# Altium PCB SensCharger.PcbDoc
Units mm, origin at the board's own origin, x right, y up, seen from the top; angles counter-clockwise.
Board outline 25.4 x 25.4 mm, 4 copper layers (Top Layer, Layer 1, Layer 2, Bottom Layer), stack 0.532 mm thick; 48 components, 34 nets, 150 pads, 73 vias.
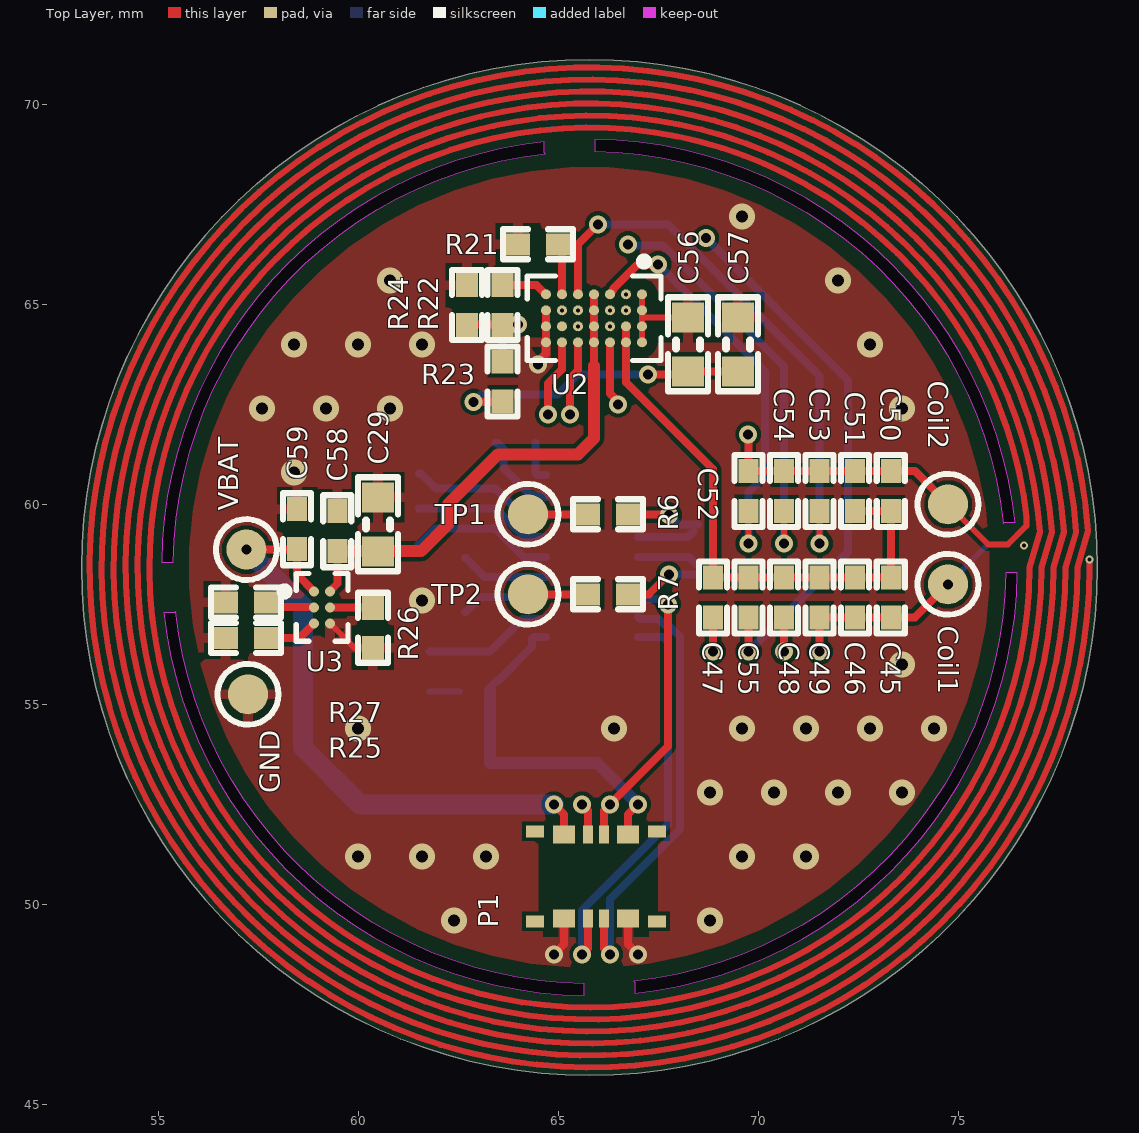
[diagram p0: Top Layer view]
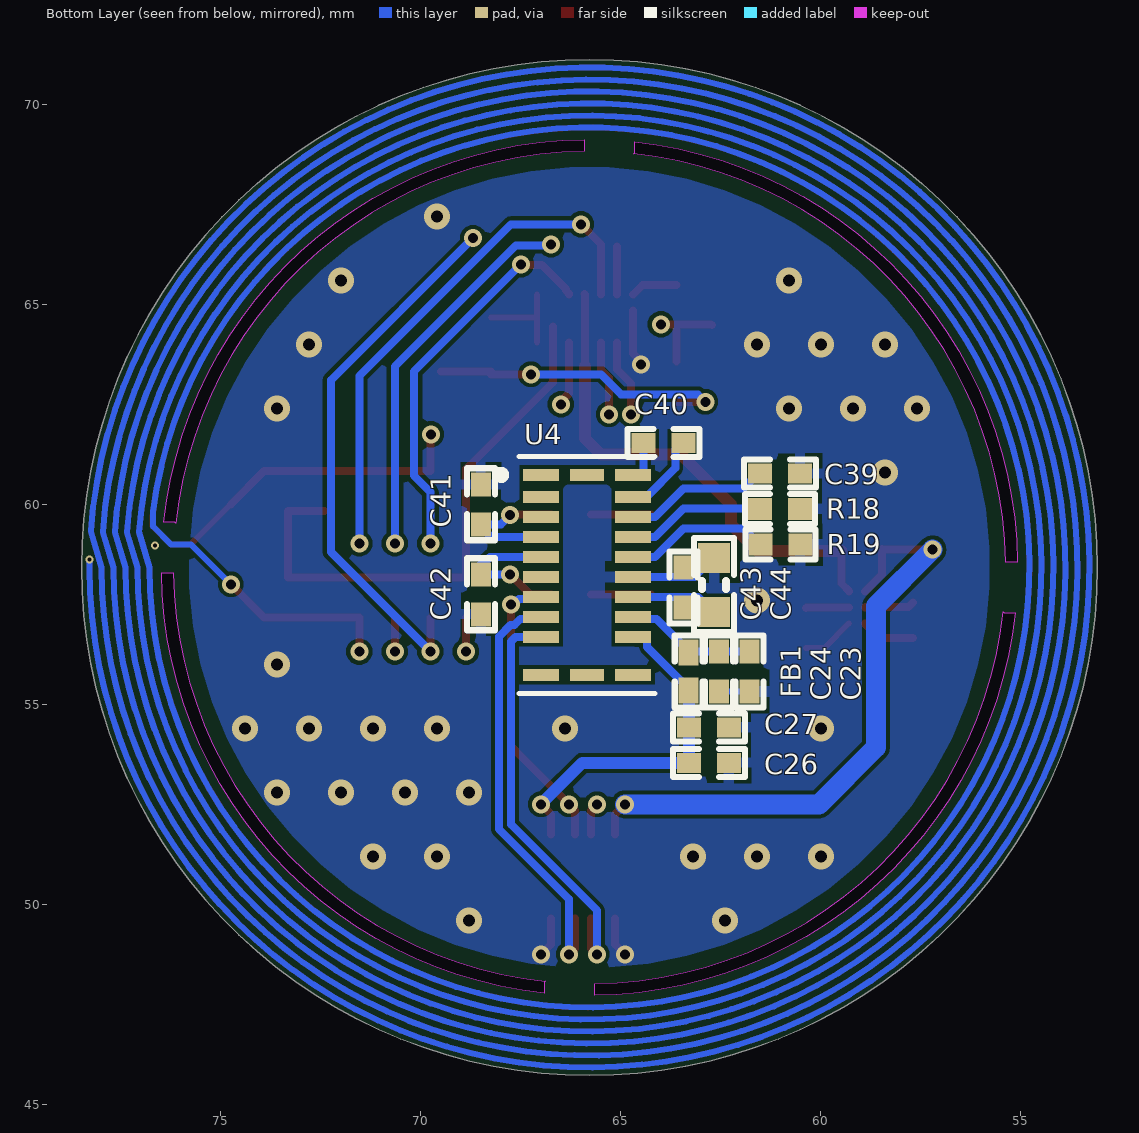
[diagram p1: Bottom Layer view, seen from below]
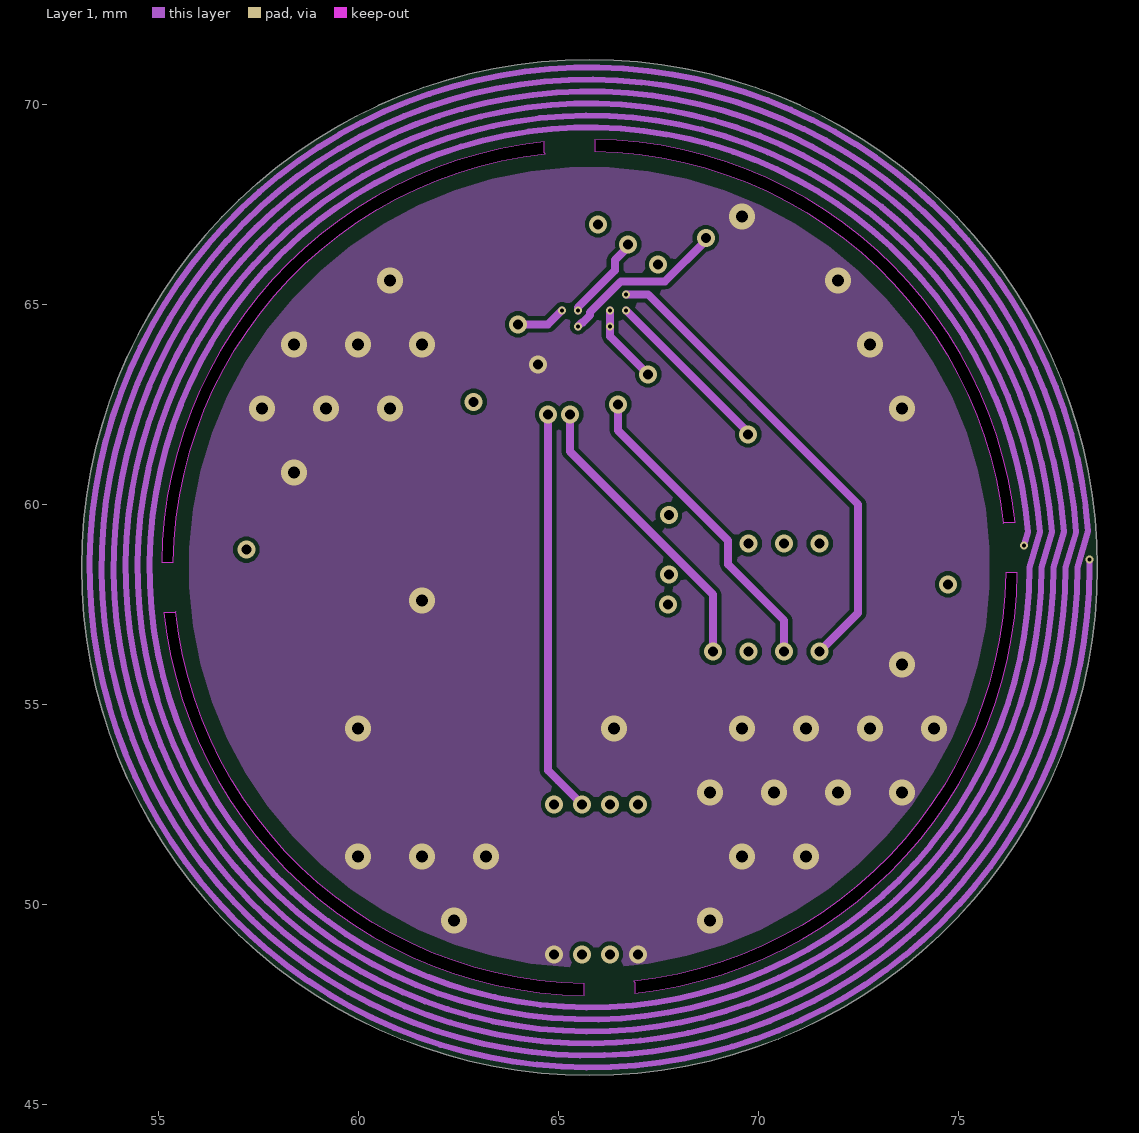
[diagram p2: Layer 1]
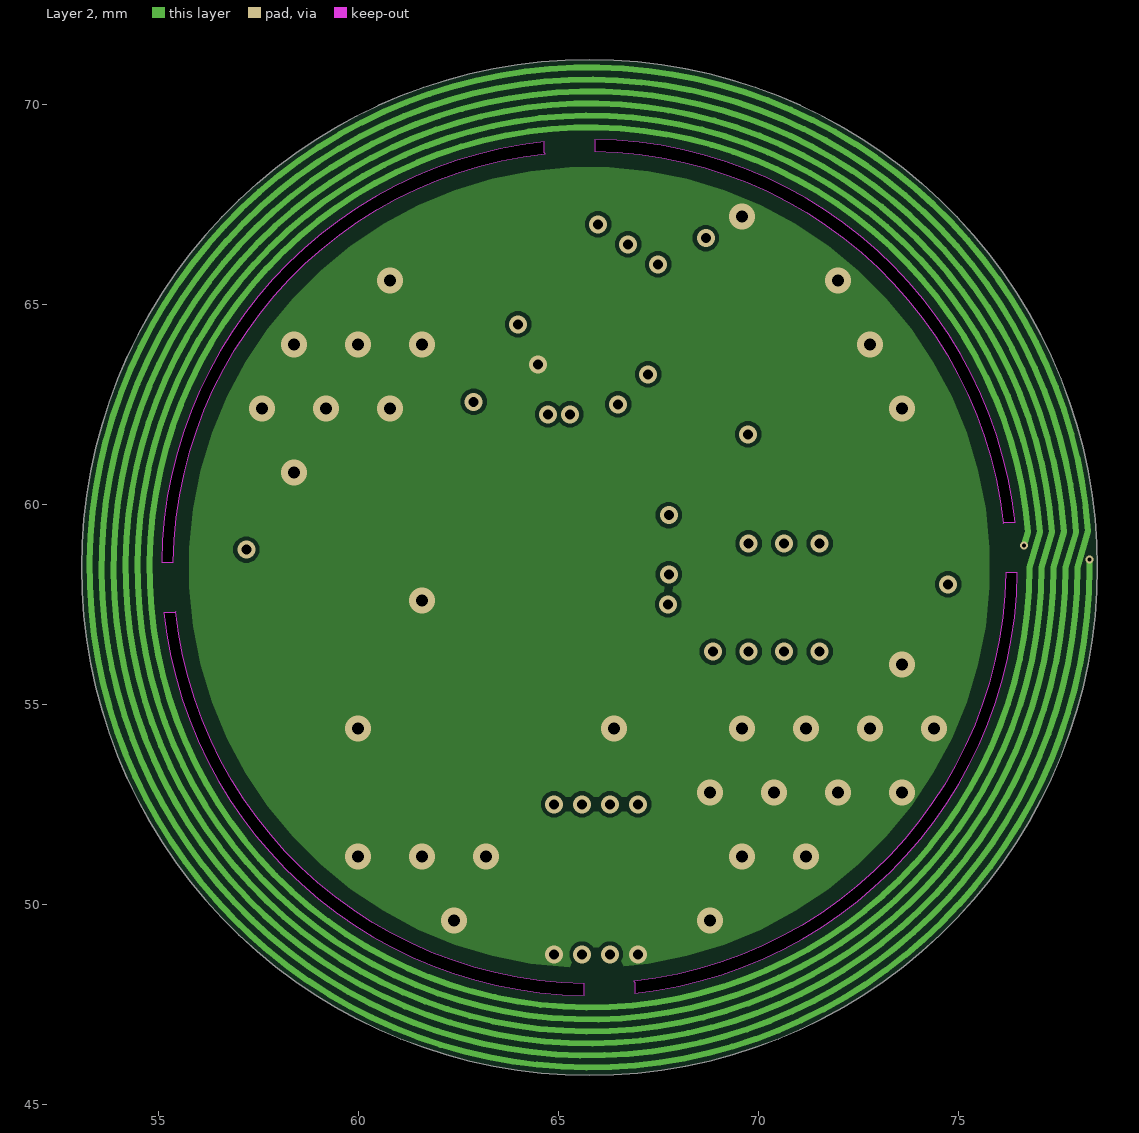
[diagram p3: Layer 2]
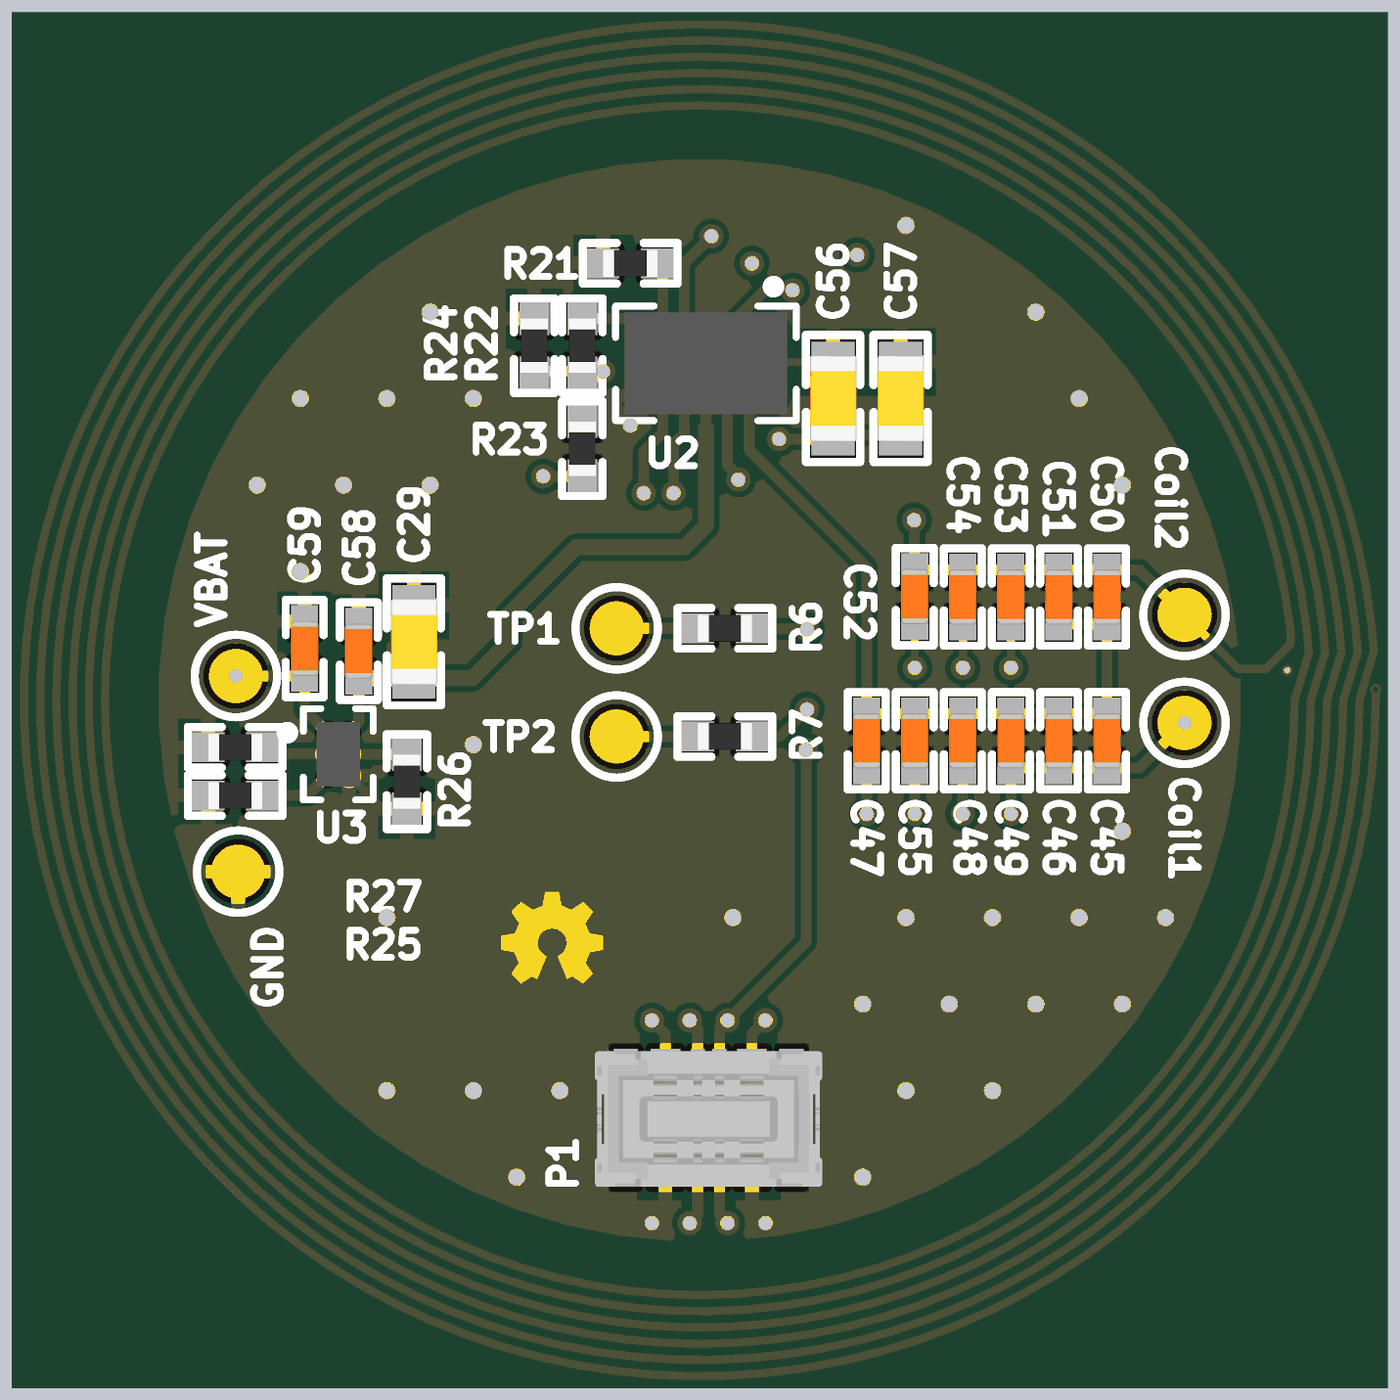
[diagram p4: 3D render of the assembled board from above, using the file's embedded part models]
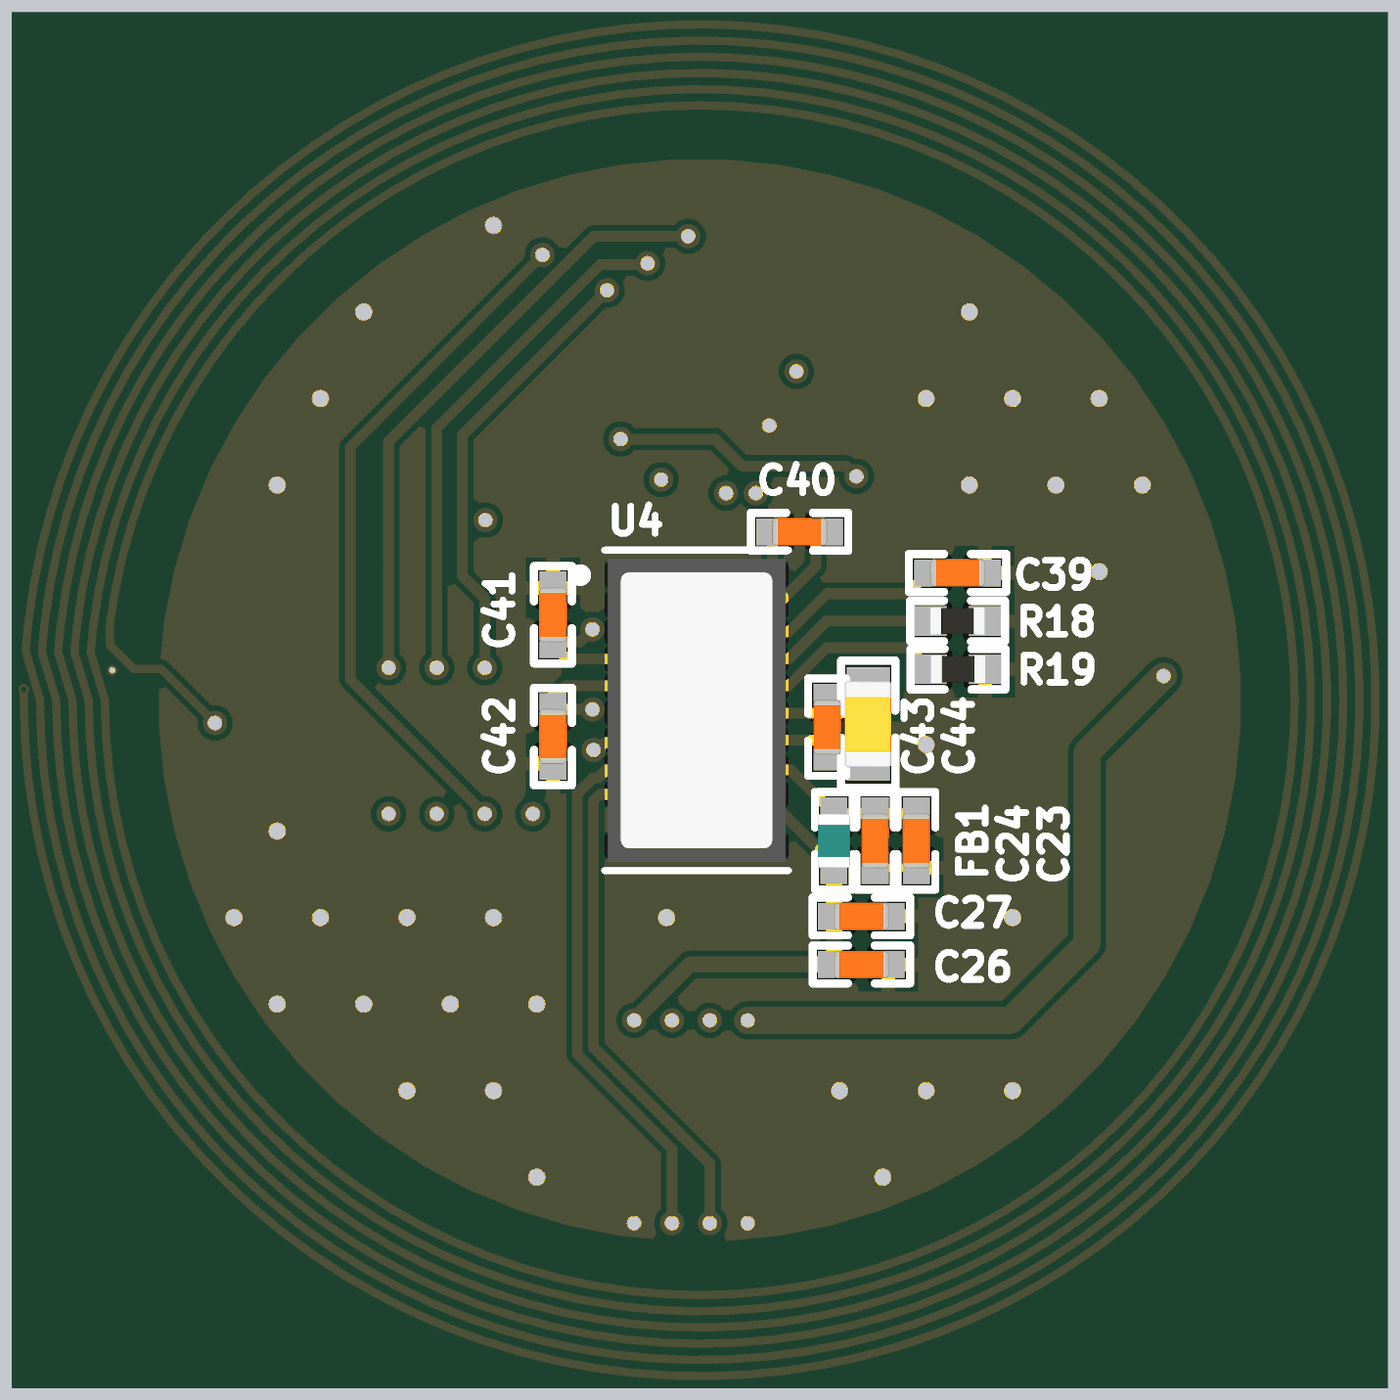
[diagram p5: 3D render of the assembled board from below, using the file's embedded part models]

## Layer stack, top to bottom
Top Solder: solder mask 0.0102, Solder Resist, Dk 3.5
Top Layer: signal copper 0.0175
Dielectric 2: prepreg 0.0711, PP-006, Dk 4.1
Layer 1: signal copper 0.0175
Dielectric 1: dielectric 0.32, FR-4, Dk 4.8
Layer 2: signal copper 0.0175
Dielectric 3: prepreg 0.0711, PP-006, Dk 4.1
Bottom Layer: signal copper 0.0175
Bottom Solder: solder mask 0.0102, Solder Resist, Dk 3.5

## Board outline
53.088,58.42 cw(c65.786,58.42) 65.786,71.118 cw(c65.786,58.42) 78.484,58.42 cw(c65.786,58.42) 65.786,45.722 cw(c65.786,58.42)
cut-out: 65.918,69.119 65.918,68.823 cw(c65.786,58.424) 76.127,59.523 76.159,59.555 76.426,59.555 ccw(c65.786,58.42)
cut-out: 76.485,58.288 76.189,58.288 cw(c65.79,58.42) 66.889,48.079 66.921,48.047 66.921,47.78 ccw(c65.786,58.42)
cut-out: 65.654,47.721 65.654,48.017 cw(c65.786,58.416) 55.445,57.317 55.413,57.285 55.146,57.285 ccw(c65.786,58.42)
cut-out: 55.087,58.552 55.383,58.552 cw(c65.782,58.42) 64.683,68.761 64.651,68.793 64.651,69.06 ccw(c65.786,58.42)

## Design rules (kind name [scope] priority, off if disabled: settings)
Clearance [All] p1: gap=0.1 ignorepadtopadclearanceinfootprint=TRUE
ComponentClearance [All] p1 off: gap=0.254 collisioncheckmode=3 verticalgap=0.254 showdistances=FALSE
DiffPairsRouting [InDifferentialPair('DiffPair')] p1: maxlimit=0.254 minlimit=0.089 mostfreqgap=0.2 toplayer_minwidth=0.089 toplayer_maxwidth=0.381 toplayer_prefwidth=0.15 midlayer1_minwidth=0.089 midlayer1_maxwidth=0.381 midlayer1_prefwidth=0.15 midlayer2_minwidth=0.089 midlayer2_maxwidth=0.381 midlayer2_prefwidth=0.15 bottomlayer_minwidth=0.089 bottomlayer_maxwidth=0.381 bottomlayer_prefwidth=0.15 maxuncoupledlength=12.7
HoleSize [All] p1 off: absolutevalues=TRUE maxlimit=2.54 minlimit=0.025 maxpercent=80.000 minpercent=20.000
HoleToHoleClearance [All] p1 off: gap=0.254 allowstackedmicrovias=TRUE
MatchedLengths usb [InDifferentialPair('USB')] p1: tolerance=1 checknetsindiffpair=FALSE checkdiffpairvsdiffpair=TRUE checkxsignals=TRUE checkothers=TRUE
MinimumAnnularRing [IsVia] p1: minimumring=0.05
MinimumSolderMaskSliver [All] p1 off: minsoldermaskwidth=0.254
PlaneConnect [InNet('NetC11_2')] p1: planeconnectstyle=Direct reliefexpansion=0.508 reliefentries=4 reliefconductorwidth=0.254 reliefairgap=0.254
PolygonConnect [All] p1: thpad.connectstyle=Relief thpad.reliefconductorwidth=0.254 thpad.reliefentries=4 thpad.polygonreliefangle="90 Angle" thpad.airgapwidth=0.254 smdpad.connectstyle=Relief smdpad.reliefconductorwidth=0.254 smdpad.reliefentries=4 smdpad.polygonreliefangle="90 Angle" smdpad.airgapwidth=0.254 via.connectstyle=Direct via.reliefconductorwidth=0.254 via.reliefentries=4 via.polygonreliefangle="90 Angle" via.airgapwidth=0.254
PolygonConnect 3V3MCU [InNet('NetC11_2')] p2: connectstyle=Direct reliefconductorwidth=0.254 reliefentries=4 polygonreliefangle="90 Angle" airgapwidth=0.254
PolygonConnect VBUSMCU [InNet('NetC12_2')] p3: connectstyle=Direct reliefconductorwidth=0.254 reliefentries=4 polygonreliefangle="90 Angle" airgapwidth=0.254
PolygonConnect VUSB [InNet('VUSB')] p4: connectstyle=Direct reliefconductorwidth=0 reliefentries=4 polygonreliefangle="90 Angle" airgapwidth=0
PolygonConnect viagnd [InNet('GND')] p5: thpad.connectstyle=Relief thpad.reliefconductorwidth=0.254 thpad.reliefentries=4 thpad.polygonreliefangle="90 Angle" thpad.airgapwidth=0.254 smdpad.connectstyle=Relief smdpad.reliefconductorwidth=0.254 smdpad.reliefentries=4 smdpad.polygonreliefangle="90 Angle" smdpad.airgapwidth=0.254 via.connectstyle=Direct via.reliefconductorwidth=0.254 via.reliefentries=4 via.polygonreliefangle="90 Angle" via.airgapwidth=0.254
RoutingVias [All] p1: holewidth=0.2 width=0.4 viastyle="Through Hole" minholewidth=0.1 minwidth=0.2 maxholewidth=6.3 maxwidth=1.27
SilkToSilkClearance [All] p1 off: silktosilkclearance=0.254
SilkToSolderMaskClearance [IsPad] p1 off: minsilkscreentomaskgap=0.254 clearancetoexposedcopper=TRUE
SolderMaskExpansion [All] p1: expansion=0.102 istentingtop=FALSE
Width [All] p1: maxlimit=1 minlimit=0.081 preferedwidth=0.15
22 further rules are at their usual default settings.

## Components (designator, comment, footprint, x,y, rotation, side; value= is the part's Value field where it differs from the comment)
C23 "100nF" C0402 61.781,55.82 r90 bottom value=100pF
C24 "4.7uF" C0402 62.543,55.82 r90 bottom value=100pF
C26 "100nF" C0402 62.797,53.534 r0 bottom value=100pF
C27 "4.7uF" C0402 62.797,54.423 r0 bottom value=100pF
C29 "2.2uF" C0603 60.5,59.5 r90 top value=100pF
C39 "1uF" C0402 61.019,60.773 r180 bottom value=100pF
C40 "1uF" C0402 63.94,61.535 r0 bottom value=100pF
C41 "10pF" C0402 68.5,60 r270 bottom value=100pF
C42 "10pF" C0402 68.5,57.75 r90 bottom value=100pF
C43 "100nF" C0402 63.432,57.923 r270 bottom value=100pF
C44 "10uF" C0603 62.67,57.979 r270 bottom value=100pF
C45 "47nF" C0402 73.318,57.67 r270 top value=100pF
C46 "68nF" C0402 72.429,57.67 r270 top value=100pF
C47 "22nF" C0402 68.873,57.67 r90 top value=100pF
C48 "10nF" C0402 70.651,57.67 r90 top value=100pF
C49 "68nF" C0402 71.54,57.67 r270 top value=100pF
C50 "1.8nF" C0402 73.318,60.329 r90 top value=100pF
C51 "100pF" C0402 72.429,60.329 r90 top
C52 "10nF" C0402 69.762,60.337 r90 top value=100pF
C53 "22nF" C0402 71.54,60.329 r90 top value=100pF
C54 "470nF" C0402 70.651,60.329 r90 top value=100pF
C55 "470nF" C0402 69.762,57.67 r90 top value=100pF
C56 "10uF" C0603 68.25,64 r90 top value=100pF
C57 "4.7uF" C0603 69.5,64 r90 top value=100pF
C58 "100nF" C0402 59.481,59.326 r90 top value=100pF
C59 "1uF" C0402 58.479,59.376 r90 top value=100pF
Coil1 "DNP" TP_SMD_1.0mm 74.75,58 r90 top
Coil2 "DNP" TP_SMD_1.0mm 74.75,60 r0 top
FB1 "BLM15AX102SN1D" IND0402 63.305,55.82 r270 bottom value=120R/0.55A
GND "DNP" TP_SMD_1.0mm 57.25,55.25 r90 top
P1 "5050040812" 5050040812 68.217,48.57 r90 top
R6 "50K" RES0402 66.25,59.75 r0 top value=0R
R7 "50K" RES0402 66.25,57.75 r0 top value=0R
R18 "0R" RES0402 61.019,59.884 r180 bottom
R19 "0R" RES0402 61.011,58.995 r180 bottom
R21 "10K" RES0402 64.5,66.5 r0 top value=0R
R22 "845R" RES0402 63.614,64.977 r90 top value=0R
R23 "20K" RES0402 63.614,63.072 r270 top value=0R
R24 "196R" RES0402 62.725,64.977 r270 top value=0R
R25 "10K" RES0402 57.195,56.659 r0 top value=0R
R26 "1K" RES0402 60.37,56.913 r90 top value=0R
R27 "10K" RES0402 57.195,57.548 r0 top value=0R
TP1 "DNP" TP_SMD_1.0mm 64.25,59.75 r90 top
TP2 "DNP" TP_SMD_1.0mm 64.25,57.75 r90 top
U2 "BQ51003YFPR" BQ51003 65.9,64.65 r270 top
U3 "BQ25100YFPT" BQ25100YFP 59.1,57.421 r0 top
U4 "MAX86150EFF+T" MAX86150EFF+ 65.845,58.233 r180 bottom
VBAT "DNP" TP_SMD_1.0mm 57.209,58.868 r180 top

## Footprints (in the part's own frame and the unit in brackets; to place one, negate y for a bottom-side part, rotate by r counter-clockwise, add the part's x,y. Pads: shape width x height; smd on the part's side, far side on the other; paste and mask are expansions set on the pad)
5050040812 [mm] "0.8mm height mated board to board connector"
  rect 0.45x0.55 smd: 1(1.08,3.067) 4(1.08,1.467) 5(3.18,1.467) 8(3.18,3.067)
  rect 0.45x0.26 smd: 2(1.08,2.467) 3(1.08,2.067) 6(3.18,2.067) 7(3.18,2.467)
  rect 0.3x0.45 smd: 9(1.005,3.797) 9(1.005,0.737) 9(3.255,0.737) 9(3.255,3.797)
  body extent 0.85,0.17 3.35,4.37, height 0.73
BQ25100YFP [mm] "Liion Charger"
  round 0.25 smd: A1(-0.2,0.4) A2(0.2,0.4) B1(-0.2,0) B2(0.2,0) C1(-0.2,-0.4) C2(0.2,-0.4)
  silkscreen extent -1.04,-0.84 0.64,0.84, body extent -0.4,-0.6 0.4,0.6, height 0.5
BQ51003 [mm]
  round 0.25 smd: A1(-0.6,1.2) A2(-0.2,1.2) A3(0.2,1.2) A4(0.6,1.2) B1(-0.6,0.8) B2(-0.2,0.8) B3(0.2,0.8) B4(0.6,0.8) C1(-0.6,0.4) C2(-0.2,0.4) C3(0.2,0.4) C4(0.6,0.4) D1(-0.6,0) D2(-0.2,0) D3(0.2,0) D4(0.6,0) E1(-0.6,-0.4) E2(-0.2,-0.4) E3(0.2,-0.4) E4(0.6,-0.4) F1(-0.6,-0.8) F2(-0.2,-0.8) F3(0.2,-0.8) F4(0.6,-0.8) G1(-0.6,-1.2) G2(-0.2,-1.2) G3(0.2,-1.2) G4(0.6,-1.2)
  silkscreen extent -1.52,-1.67 1.06,1.67, body extent -0.94,-1.5 0.94,1.5, height 0.5
C0402 [mm]
  rect 0.6x0.5 smd: 1(-0.5,0) 2(0.5,0)
  silkscreen extent -0.9,-0.35 0.9,0.35, body extent -0.51,-0.25 0.51,0.25, height 0.5
C0603 [mm]
  rect 0.75x0.8 smd: 1(-0.675,0) 2(0.675,0)
  silkscreen extent -1.17,-0.5 1.17,0.5, body extent -0.8,-0.44 0.8,0.43, height 0.8
IND0402 [mm]
  rect 0.65x0.5 smd: 1(-0.475,0) 2(0.475,0)
  silkscreen extent -0.9,-0.35 0.9,0.35, body extent -0.5,-0.3 0.5,0.3, height 0.5
MAX86150EFF+ [mm] "BioSensor"
  rect 0.9x0.3 smd: 1(-1.15,2.5) 2(-1.15,1.95) 3(-1.15,1.45) 4(-1.15,0.95) 5(-1.15,0.45) 6(-1.15,-0.05) 7(-1.15,-0.55) 8(-1.15,-1.05) 9(-1.15,-1.55) 10(-1.15,-2.5) 12(1.15,-2.5) 13(1.15,-1.55) 14(1.15,-1.05) 15(1.15,-0.55) 16(1.15,-0.05) 17(1.15,0.45) 18(1.15,0.95) 19(1.15,1.45) 20(1.15,1.95) 21(1.15,2.5)
  rect 0.85x0.3 smd: 11(0,-2.5) 22(0,2.5)
  silkscreen extent -2.25,-2.96 1.7,2.96, body extent -1.65,-2.8 1.65,2.8, height 1.4
RES0402 [mm]
  rect 0.6x0.55 smd: 1(-0.5,0) 2(0.5,0)
  silkscreen extent -0.87,-0.38 0.88,0.38, body extent -0.5,-0.25 0.5,0.25, height 0.3
TP_SMD_1.0mm [mm]
  round 1 smd paste-5: 1(0,0)
  silkscreen extent -0.76,-0.76 0.76,0.76

## Part data
C23 C24 C26 C27 C29 C39 C40 C41 C42 C43 C44 C45 C46 C47 C48 C49 C50 C51 C52 C53 C54 C55 C56 C57 C58 C59: library part CAP, "Capacitor", Published=8-Jun-2000, Publisher="Altium Limited", Revision="July-2002: Re-released for DXP Platform."
Coil1 Coil2 GND TP1 TP2 VBAT: library part TP
FB1: "Ferrite Bead, 1000 Ohm @ 100MHz", Manufacturer=Murata, Manufacturer Part Number=BLM15AG121SN1D, Part Number=FB0402-120R@100M-500mA, Part number IPS=N.A., Artikkelnr Noca=33029317, ComponentLink1Description=Datasheet, ComponentLink2Description="Supplier link", Footprint Doc=0402, HelpURL=http://search.murata.co.jp/Ceramy/image/img/PDF/ENG/L0110S0100BLM15A_SN.pdf, LatestRevisionDate=2014-01-10, Note="Chip EMIFIL Inductor Type Chip Ferrite Bead", Pin Count=2, Published=2011-11-14, Publisher="Nordic Semiconductor"
P1: library part "8 Pin Connector", "Generic 8 pin connector, see footprint for MPN"
R6 R7 R18 R19 R21 R22 R23 R24 R25 R26 R27: "Resistor, Â±5%, 0.05W", Part Number=R0201-0R, Part number IPS=00000003245, Artikkelnr Noca=N.A., ComponentLink1Description=Datasheet, ComponentLink2Description="Supplier link", Footprint Doc=0201, LatestRevisionDate=2017-11-09, Note="Chip Res 5%", Pin Count=2, Published=2014-11-13, Publisher="Nordic Semiconductor"
U2: "BQ51003 Wireless power Receiver 28-DSBGA -40 to 85", Package=None, Availability=Unavailable, MP=BQ51003YFPR, Price=None
U3: "Standalone 1-cell, 250-mA linear battery charger with 4.2-V charge voltage and prog. pre-charge 6-DSBGA 0 to 125", Package="DSBGA-6 Texas Instruments", Digi-Key_Part_Number=296-38373-1-ND, DigiKey-Purchase-URL=https://snapeda.com/shop?store=DigiKey&id=251118, MF="Texas Instruments", Mouser-Purchase-URL=https://snapeda.com/shop?store=Mouser&id=251118, MP=BQ25100YFPT, SnapEDA_Link=https://www.snapeda.com/parts/BQ25100YFPT/Texas%20Instruments/view-part/251118/?ref=snap, Texas_Instruments-Purchase-URL=https://snapeda.com/shop?store=Texas+Instruments&id=251118
U4: "Oximeter/Heart Rate Sensor IÃ‚Â²C Output", Package="OLGA-22 Maxim", Availability=Unavailable, MF="Maxim Integrated", MP=MAX86150EFF+, Price=None, SnapEDA_Link=https://www.snapeda.com/parts/MAX86150EFF%2B/Maxim%20Integrated/view-part/680829/?ref=snap

## Via types
v1: diameter 0.45, hole 0.25, Top Layer to Bottom Layer, tented both sides, 32 vias
v2: diameter 0.65, hole 0.3, Top Layer to Bottom Layer, tented both sides, 31 vias
v3: diameter 0.2, hole 0.1, Top Layer to Layer 1, tented both sides, 8 vias
v4: diameter 0.2, hole 0.1, Layer 2 to Bottom Layer, tented both sides, 1 vias
v5: diameter 0.2, hole 0.1, Top Layer to Bottom Layer, tented both sides, 1 vias

## Nets (pads, with @x,y where several pads share a name; then routed paths per layer and width w, separated by ;. In a path a pad name is that pad's centre, name@x,y a point inside that pad or via, vN(x,y) a via of type N, cw(c..) or ccw(c..) an arc to the next point about the centre after c; other vN are vias at no path point)
1V8: C26.2 C27.2 FB1.2 P1.5 U4.13 | length 8.9
  Top Layer w0.2: P1.5 66.75,52.25 v1(67,52.5)
  Bottom Layer w0.2: FB1.2 63.305,55.42 63.455,55.57 63.486,55.57 64.345,56.429 64.345,56.633 64.395,56.683 U4.13
  Bottom Layer w0.3: FB1.2 63.301,55.341 63.301,54.423 63.301,53.538 C26.2 65.966,53.534 v1(67,52.5)
3V3: C43.2 C44.2 U4.15 | length 2.2
  Bottom Layer w0.2: C44.2 62.695,57.304 63.074,57.683 63.432,57.683 U4.15
CHG: P1.7 U2.F4 | length 12.9
  Top Layer w0.2: v1(64.75,62.25) 64.75,63.025 65.1,63.375 U2.F4 ; v1(65.6,52.5) 65.75,52.35 P1.7
  Layer 1 w0.2: v1(64.75,62.25) 64.75,53.35 65,53.1 v1(65.6,52.5)
COIL: C45.2 C46.2 C49.2 C50.2 C51.2 C52.2 C53.2 C54.2 Coil1.1 Coil2.1 U2.B1 U2.B2 | length 1802.4
  Top Layer w0.15: Coil2.1 75.75,59 76.25,59 76.712,59.462 76.712,59.691 ccw(c65.786,58.42) 76.786,58.42 77.051,59.306 ccw(c65.786,58.42) 77.086,58.42 77.352,59.31 ccw(c65.786,58.42) 77.386,58.42 77.652,59.313 ccw(c65.786,58.42) 77.686,58.42 77.954,59.307 ccw(c65.786,58.42) 77.986,58.42 78.253,59.335 ccw(c65.786,58.42) 78.286,58.42 v3(78.286,58.62)
  Top Layer w0.2: v1(69.75,61.75) 69.756,61.744 69.756,60.843 C52.2 69.77,60.829 C54.2 C53.2 C51.2 C50.2 73.921,60.829 Coil2.1 ; v1(71.54,56.319) C49.2 C46.2 C45.2 73.92,57.17 v1(74.75,58)
  Layer 1 w0.15: v5(76.65,58.975) 76.751,59.302 ccw(c65.786,58.42) 76.786,58.42 77.051,59.306 ccw(c65.786,58.42) 77.086,58.42 77.352,59.31 ccw(c65.786,58.42) 77.386,58.42 77.652,59.313 ccw(c65.786,58.42) 77.686,58.42 77.954,59.307 ccw(c65.786,58.42) 77.986,58.42 78.253,59.335 ccw(c65.786,58.42) 78.286,58.42 v3(78.286,58.62)
  Layer 1 w0.2: v3(66.7,64.85) 69.75,61.8 v1(69.75,61.75) ; v3(66.7,65.25) 67.25,65.25 72.5,60 72.5,57.279 v1(71.54,56.319)
  Layer 2 w0.15: v5(76.65,58.975) 76.751,59.302 ccw(c65.786,58.42) 76.786,58.42 77.051,59.306 ccw(c65.786,58.42) 77.086,58.42 77.352,59.31 ccw(c65.786,58.42) 77.386,58.42 77.652,59.313 ccw(c65.786,58.42) 77.686,58.42 77.954,59.307 ccw(c65.786,58.42) 77.986,58.42 78.253,59.335 ccw(c65.786,58.42) 78.286,58.42 v3(78.286,58.62)
  Bottom Layer w0.15: v1(74.75,58) 75.75,59 76.25,59 76.697,59.447 76.697,59.816 ccw(c65.786,58.42) 76.786,58.42 77.051,59.306 ccw(c65.786,58.42) 77.086,58.42 77.352,59.31 ccw(c65.786,58.42) 77.386,58.42 77.652,59.313 ccw(c65.786,58.42) 77.686,58.42 77.954,59.307 ccw(c65.786,58.42) 77.986,58.42 78.253,59.335 ccw(c65.786,58.42) 78.286,58.42 v3(78.286,58.62)
  other v4: 78.286,58.62
GND: C23.1 C24.1 C26.1 C27.1 C29.2 C39.2 C41.1 C42.1 C43.1 C44.1 C56.2 C57.2 C58.2 C59.2 GND.1 P1.1 P1.4 R18.2 R19.2 R21.1 R24.1 R25.1 R26.1 R27.1 U2.A1 U2.A2 U2.A3 U2.A4 U2.G2 U2.G3 U2.G4 U3.C2 U4.16 | length 10.1
  Top Layer w0.15: U3.C2 59.908,56.413 R26.1 ; U2.A4 U2.A3 67.1,64.675 ; U2.A1 67.1,64.675 ; C56.2 67.1,64.675
  Top Layer w0.2: v1(64.5,63.5) 64.5,63.568 64.7,63.768 U2.G4 U2.G3 U2.G2 ; v1(64.9,48.75) 65.15,49 P1.1 ; P1.4 66.75,49 v1(67,48.75)
  Bottom Layer w0.15: C23.1 C24.1
  Bottom Layer w0.2: C44.1 62.695,58.654 63.166,58.183 U4.16
  other v2: 62.4,49.6 68.8,49.6 60,51.2 61.6,51.2 63.2,51.2 69.6,51.2 71.2,51.2 68.8,52.8 70.4,52.8 72,52.8 73.6,52.8 60,54.4 66.4,54.4 69.6,54.4 71.2,54.4 72.8,54.4 74.4,54.4 73.6,56 61.6,57.6 58.4,60.8 57.6,62.4 59.2,62.4 60.8,62.4 73.6,62.4 58.4,64 60,64 61.6,64 72.8,64 60.8,65.6 72,65.6 69.6,67.2
INT3: P1.6 U4.7 | length 7.2
  Top Layer w0.2: P1.6 66.15,52.35 v1(66.3,52.5) 67.75,53.95 v1(67.75,57.5)
  Bottom Layer w0.2: U4.7 67.045,57.633 67.549,57.633 67.682,57.5 v1(67.75,57.5)
NetC23_2: C23.2 C24.2 FB1.1 U4.14 | length 3.3
  Bottom Layer w0.2: C23.2 C24.2 63.297,56.32 64.11,57.133 64.645,57.133 U4.14
NetC39_1: C39.1 U4.19 | length 3.6
  Bottom Layer w0.2: C39.1 61.569,60.773 61.95,60.392 63.436,60.392 64.145,59.683 U4.19
NetC40_1: C40.1 U4.20 | length 2.1
  Bottom Layer w0.2: C40.1 63.49,61.535 63.64,61.385 63.64,60.905 64.312,60.233 64.645,60.233 U4.20
NetC40_2: C40.2 U4.21 | length 1
  Bottom Layer w0.2: C40.2 64.44,60.783 64.49,60.733 U4.21
NetC41_2: C41.2 R6.2 U4.4 | length 3.3
  Top Layer w0.2: R6.2 66.76,59.74 67.76,59.74 v1(67.77,59.731)
  Bottom Layer w0.2: U4.4 68.25,59.183 C41.2@68.383,59.317 ; v1(67.77,59.731) 68.003,59.498 68.498,59.498 C41.2
NetC42_2: C42.2 R7.2 U4.5 | length 3.6
  Top Layer w0.2: R7.2 67.27,57.75 v1(67.77,58.25)
  Bottom Layer w0.2: U4.5 68.274,58.683 68.47,58.487 C42.2@68.52,58.487 ; v1(67.77,58.25) C42.2
NetC45_1: C45.1 C46.1 C47.2 C48.2 C49.1 C50.1 C51.1 C55.2 U2.B3 U2.B4 | length 14.2
  Top Layer w0.2: U2.B3 U2.B4 66.7,63.05 68.873,60.877 C47.2 C55.2 C48.2 C45.1 C50.1 C51.1
NetC47_1: C47.1 U2.E4 | length 10.1
  Top Layer w0.2: v1(65.3,62.25) 65.3,63.151 65.5,63.351 U2.E4 ; v1(68.873,56.319) C47.1
  Layer 1 w0.2: v1(65.3,62.25) 65.3,61.321 68.873,57.748 v1(68.873,56.319)
NetC48_1: C48.1 U2.C4 | length 10.4
  Top Layer w0.2: U2.C4 66.3,62.768 66.5,62.568 v1(66.5,62.5) ; v1(70.651,56.319) C48.1
  Layer 1 w0.2: v1(66.5,62.5) 66.5,61.841 69.25,59.091 69.25,58.5 70.651,57.099 v1(70.651,56.319)
NetC52_1: C52.1 U2.C1 | length 10.6
  Top Layer w0.15: v1(69.762,59.021) C52.1
  Top Layer w0.2: U2.C1 66.3,65.264 66.375,65.339 66.375,65.385 66.975,65.985 67.485,65.985 v1(67.5,66)
  Bottom Layer w0.2: v1(67.5,66) 70.175,63.325 70.175,60.714 69.762,60.301 v1(69.762,59.021)
NetC53_1: C53.1 U2.E1 | length 14.1
  Top Layer w0.15: v1(71.54,59.021) C53.1
  Top Layer w0.2: U2.E1 65.5,66.5 v1(66,67)
  Bottom Layer w0.2: v1(66,67) 67.75,67 71.54,63.21 v1(71.54,59.021)
NetC54_1: C54.1 U2.E2 | length 12.6
  Top Layer w0.15: v1(70.651,59.021) C54.1
  Layer 1 w0.2: v3(65.5,64.85) 65.5,64.924 66.426,65.851 66.426,66.109 66.75,66.432 v1(66.75,66.5)
  Bottom Layer w0.2: v1(66.75,66.5) 66.775,66.475 67.626,66.475 70.651,63.45 v1(70.651,59.021)
NetC55_1: C55.1 U2.E3 | length 17.9
  Top Layer w0.2: v1(69.762,56.319) C55.1
  Layer 1 w0.2: v3(65.5,64.45) 65.6,64.55 65.624,64.55 65.8,64.726 65.8,64.8 66.575,65.575 67.676,65.575 68.696,66.595 v1(68.696,66.655)
  Bottom Layer w0.2: v1(68.696,66.655) 72.25,63.101 72.25,58.807 v1(69.762,56.319)
NetR6_1: R6.1 TP1.1 | length 1.5
  Top Layer w0.2: TP1.1 R6.1
NetR7_1: R7.1 TP2.1 | length 1.5
  Top Layer w0.2: TP2.1 R7.1
NetR18_1: R18.1 U4.18 | length 3.5
  Bottom Layer w0.2: R18.1 61.527,59.892 63.436,59.892 64.145,59.183 U4.18
NetR19_1: R19.1 U4.17 | length 3.6
  Bottom Layer w0.2: R19.1 61.536,58.995 61.933,59.392 63.436,59.392 64.145,58.683 U4.17
NetR21_2: R21.2 U2.F1 | length 1.2
  Top Layer w0.2: U2.F1 R21.2@65.1,66.447
NetR22_1: R22.1 R23.1 R24.2 U2.F2 | length 3.4
  Top Layer w0.2: R24.2 62.748,64.5 v1(64,64.5) ; R23.1 R22.1
  Layer 1 w0.2: v1(64,64.5) 64.75,64.5 v3(65.1,64.85)
NetR22_2: R22.2 U2.G1 | length 1.2
  Top Layer w0.2: R22.2 64.459,65.477 64.686,65.25 U2.G1
NetR25_2: R25.2 U3.C1 | length 1.4
  Top Layer w0.2: R25.2 58.538,56.659 U3.C1
NetR26_2: R26.2 U3.B2 | length 1.1
  Top Layer w0.2: U3.B2 60.362,57.421 R26.2
NetR27_2: R27.2 U3.B1 | length 1.3
  Top Layer w0.2: R27.2 57.812,57.431 58.89,57.431 U3.B1
Rect: C56.1 C57.1 R23.2 U2.C2 U2.C3 | length 9.7
  Top Layer w0.2: v1(62.89,62.561) 63.603,62.561 R23.2 ; v1(67.25,63.25) 68.25,63.25 C56.1 C57.1
  Layer 1 w0.2: v3(66.3,64.85) 66.3,64.2 v1(67.25,63.25)
  Bottom Layer w0.2: v1(62.89,62.561) 63.079,62.75 65,62.75 65.5,63.25 v1(67.25,63.25)
  other v3: 66.3,64.45
SCL: P1.2 U4.9 | length 10.5
  Top Layer w0.2: v1(65.6,48.75) 65.75,48.9 P1.2
  Bottom Layer w0.2: v1(65.6,48.75) 65.6,49.85 67.75,52 67.75,56.566 67.633,56.683 U4.9
SDA: P1.3 U4.8 | length 10.9
  Top Layer w0.2: P1.3 66.15,48.9 v1(66.3,48.75)
  Bottom Layer w0.2: v1(66.3,48.75) 66.3,50.126 68.05,51.876 68.05,56.69 67.757,56.983 67.666,56.983 67.516,57.133 67.045,57.133 U4.8
VBAT: C59.1 P1.8 U3.A1 VBAT.1 | length 15.8
  Top Layer w0.2: v1(57.209,58.868) 58.471,58.868 C59.1 58.479,58.242 U3.A1 ; v1(64.9,52.5) 65.15,52.25 P1.8
  Bottom Layer w0.5: v1(57.209,58.868) 58.626,57.451 58.626,53.917 60.043,52.5 v1(64.9,52.5)
Wvdd: C29.1 C58.1 U2.D1 U2.D2 U2.D3 U2.D4 U3.A2 | length 12.6
  Top Layer w0.2: U3.A2 59.3,57.835 59.481,58.016 C58.1 ; 65.9,63.458 U2.D4 U2.D3 U2.D2 U2.D1 U2.D1@65.91,65.26
  Top Layer w0.3: C58.1 61.576,58.826 62.25,59.5 62.25,60 63.5,61.25 65.5,61.25 65.9,61.65 65.9,63.458
pads on no net: P1.9 U2.F3 U4.1 U4.2 U4.3 U4.6 U4.10 U4.11 U4.12 U4.22

## Polygon pours and split planes (outlines as drawn)
GND on Top Layer "NONET_L-01_P-001" (solid, pour order 0): 55.786,58.42 ccw(c65.786,58.42) 65.786,48.42 ccw(c65.786,58.42) 75.786,58.42 ccw(c65.786,58.42) 65.786,68.42 ccw(c65.786,58.42)
GND on Layer 1 "NONET_L-01_P-001" (solid, pour order 3): 55.786,58.42 ccw(c65.786,58.42) 65.786,48.42 ccw(c65.786,58.42) 75.786,58.42 ccw(c65.786,58.42) 65.786,68.42 ccw(c65.786,58.42)
GND on Layer 2 "NONET_L-01_P-001" (solid, pour order 2): 55.786,58.42 ccw(c65.786,58.42) 65.786,48.42 ccw(c65.786,58.42) 75.786,58.42 ccw(c65.786,58.42) 65.786,68.42 ccw(c65.786,58.42)
GND on Bottom Layer "NONET_L-01_P-001" (solid, pour order 1): 55.786,58.42 ccw(c65.786,58.42) 65.786,48.42 ccw(c65.786,58.42) 75.786,58.42 ccw(c65.786,58.42) 65.786,68.42 ccw(c65.786,58.42)

## Other copper
Top Layer:
  pour cut-out: 64.5,51.5 67.5,51.5 67.5,49.75 64.5,49.75

## Silkscreen, mask and mechanical layers (free items; w line width, h text height)
Top Solder:
  region: 2257 vertices and 0 holes, not listed, extent 62.112,53.178 64.002,54.88
Mechanical 1:
  circle w0: c65.786,58.42 r10
  circle w0.4: c65.786,58.42 r0.284
  circle w0: c65.786,58.42 r12.698
  pour cut-out: 65.918,69.119 65.918,68.823 cw(c65.786,58.424) 76.127,59.523 76.159,59.555 76.426,59.555 ccw(c65.786,58.42)
  pour cut-out: 76.485,58.288 76.189,58.288 cw(c65.79,58.42) 66.889,48.079 66.921,48.047 66.921,47.78 ccw(c65.786,58.42)
  pour cut-out: 65.654,47.721 65.654,48.017 cw(c65.786,58.416) 55.445,57.317 55.413,57.285 55.146,57.285 ccw(c65.786,58.42)
  pour cut-out: 55.087,58.552 55.383,58.552 cw(c65.782,58.42) 64.683,68.761 64.651,68.793 64.651,69.06 ccw(c65.786,58.42)
  lines w0.2: 55.383,58.552 55.087,58.552 cw(c65.786,58.42) 64.651,69.06 64.651,68.793 ; 55.387,58.548 cw(c65.786,58.42) 64.683,68.761 ; 55.413,57.285 55.146,57.285 ccw(c65.786,58.42) 65.654,47.721 ; 55.445,57.317 ccw(c65.786,58.42) 65.658,48.021 ; 65.914,68.819 cw(c65.786,58.42) 76.127,59.523 ; 65.918,69.119 cw(c65.786,58.42) 76.426,59.555 76.159,59.555 ; 66.889,48.079 ccw(c65.786,58.42) 76.185,58.292 ; 66.921,48.047 66.921,47.78 ccw(c65.786,58.42) 76.485,58.288